# Altium PCB 自控mos驱动.PcbDoc
Units mil, origin at the board's own origin, x right, y up, seen from the top; angles counter-clockwise.
Board outline 8295 x 6950 mil, 2 copper layers (Top Layer, Bottom Layer); 103 components, 111 nets, 412 pads, 146 vias.
Unrouted connection lines stored in the file: 2.
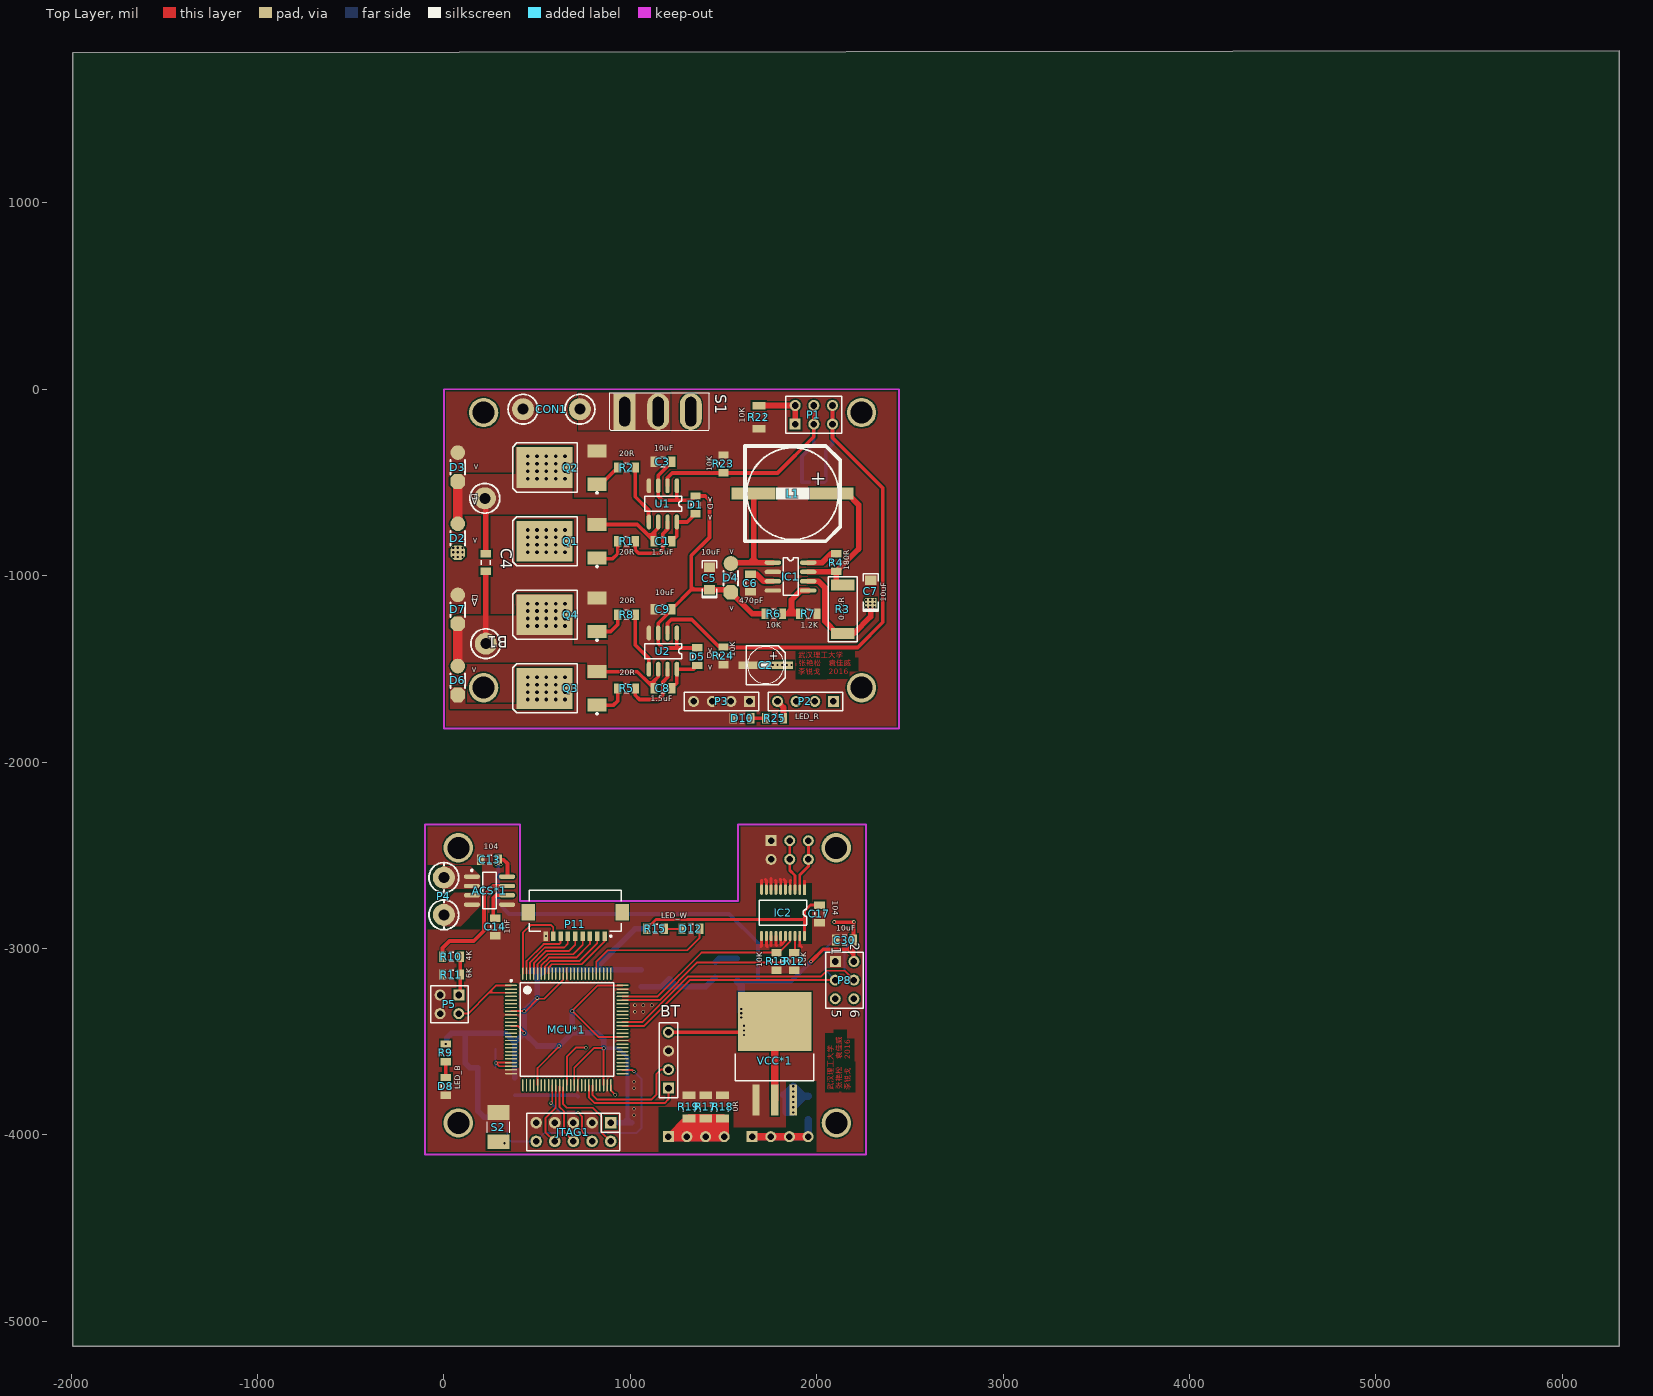
[diagram p0: Top Layer view]
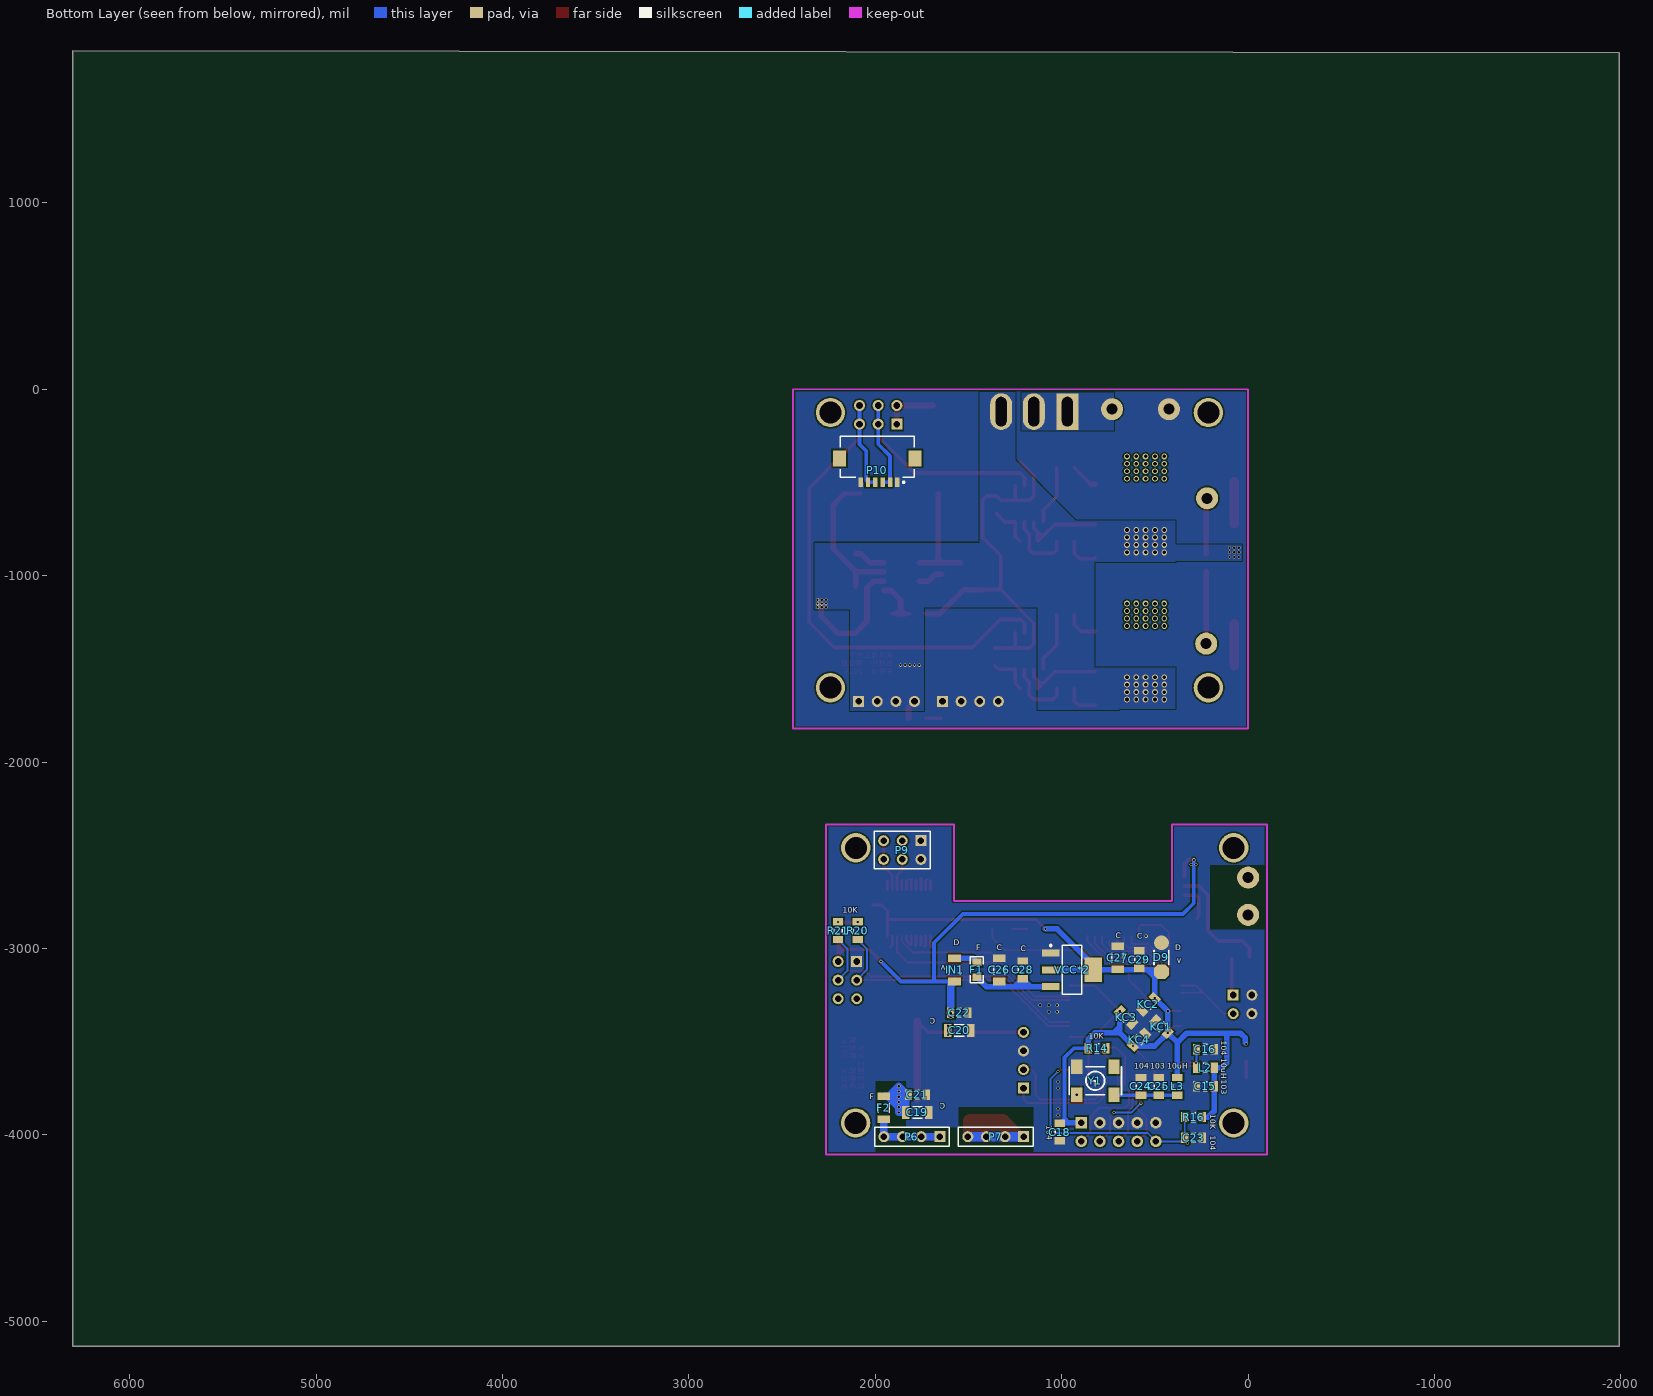
[diagram p1: Bottom Layer view, seen from below]

## Layer stack, top to bottom
Top Layer: signal copper 1.4
Dielectric: dielectric 12.6, FR-4, Dk 4.8
Bottom Layer: signal copper 1.4

## Board outline
-1990,1805 -1990,-5135 4165,-5135 6305,-5135 6305,1815

## Design rules (kind name [scope] priority, off if disabled: settings)
Clearance [All] p1: gap=8
PlaneConnect [All] p1: planeconnectstyle=Direct reliefexpansion=20 reliefentries=4 reliefconductorwidth=10 reliefairgap=10
PolygonConnect [All] p1: connectstyle=Direct reliefconductorwidth=10 reliefentries=4 polygonreliefangle="90 Angle" airgapwidth=10
RoutingVias [All] p1: holewidth=28 width=50 viastyle="Through Hole" minholewidth=28 minwidth=50 maxholewidth=28 maxwidth=50
SolderMaskExpansion [All] p1: expansion=4
Width [All] p1: maxlimit=80 minlimit=6 preferedwidth=20 minimp=50.000000 maximp=50.000000 favimp=50.000000
27 further rules are at their usual default settings.

## Classes and differential pairs
component class 自控mosV1.0: B1 C1 C2 C3 C4 C5 C6 C7 C8 C9 CON1 D1 D2 D3 D4 D5 D6 D7 D10 IC1 L1 P1 P2 P3 P10 Q1 Q2 Q3 Q4 R1 R2 R3 R4 R5 R6 R7 R8 R22 R23 R24 R25 S1 U1 U2
component class 主控板加电流检测v1: ACS*1 BT C13 C14 C15 C16 C17 C18 C19 C20 C21 C22 C23 C24 C25 C26 C27 C28 C29 C30 D8 D9 D12 F1 F2 IC2 IN1 JTAG1 KC1 KC2 KC3 KC4 L2 L3 MCU*1 P4 P5 P6 P7 P8 P9 P11 R9 R10 R11 R12 R13 R14 R15 R16 R17 R18 R19 R20 R21 S2 VCC*1 VCC*2 Y1

## Components (designator, comment, footprint, x,y, rotation, side; value= is the part's Value field where it differs from the comment)
ACS*1 "ACS712 AMPSENSOR" "SOIC1-8N ACS712" 245,-2690 r0 top
B1 "Motor" KF301-2P#1 225,-1090 r180 top
BT "Header 4" HDR1X4 1205,-3750 r90 top
C1 "CAP" C2012 1175,-815 r0 top
C2 "Cap" SMD-EC-F5 1815,-1480 r180 top
C3 "Cap Pol1" C2012 1175,-390 r180 top
C4 "Cap" C2012 225,-930 r270 top
C5 "Cap Pol1" 1206C 1425,-1015 r270 top
C6 "Cap" C2012 1645,-1040 r90 top
C7 "Cap Pol1" 1206C 2290,-1085 r270 top
C8 "Cap" C2012 1175,-1605 r0 top
C9 "Cap Pol1" C2012 1175,-1180 r180 top
C13 "Cap" C2012 245,-2525 r0 top
C14 "Cap" C2012 275,-2885 r270 top
C15 "100nF" C2012 230,-3740 r180 bottom
C16 "10nF" C2012 230,-3540 r0 bottom
C17 "100nF" C2012 2015,-2815 r270 top
C18 "100nF" C2012 1010,-3985 r270 bottom
C19 "Cap Pol1" 1206(2) 1775,-3880 r180 bottom
C20 "Cap Pol1" 1206(2) 1550,-3440 r180 bottom
C21 "Cap" C2012 1775,-3785 r0 bottom
C22 "Cap" C2012 1550,-3345 r0 bottom
C23 "100nF" C2012 292.76,-4015 r0 bottom
C24 "10nF" C2012 575,-3740 r270 bottom
C25 "100nF" C2012 480,-3740 r270 bottom
C26 "Cap Pol1" 1206(2) 1335,-3115 r90 bottom
C27 "Cap Pol1" 1206(2) 700,-3050 r90 bottom
C28 "Cap" C2012 1210,-3115 r270 bottom
C29 "Cap" C2012 585,-3060 r270 bottom
C30 "Cap Pol1" C2012 2150,-2955 r180 top
CON1 "PowerIn" KF301-2P#2 580,-107.2 r270 top
D1 "S4" R2012 1350,-620 r270 top
D2 "SS14" "hole-chip diode" 35,-721.67 r270 top
D3 "SS14" "hole-chip diode" 35,-340 r270 top
D4 "SS14" "hole-chip diode" 1500,-935 r270 top
D5 "S4" R2012 1360,-1435 r270 top
D6 "SS14" "hole-chip diode" 35,-1485 r270 top
D7 "SS14" "hole-chip diode" 35,-1103.33 r270 top
D8 "POWER" C2012 10,-3740 r270 top
D9 "1N4729A" "hole-chip diode" 505,-2970 r270 bottom
D10 "POWER" C2012 1600,-1765 r180 top
D12 "POWER" C2012 1325,-2895 r0 top
F1 "300mA" 0805(2012) 1455,-3115 r90 bottom
F2 "500mA" 1206(2) 1955,-3855 r90 bottom
IC1 "MC34063" MC34063 1860,-1005 r0 top
IC2 "74LVC245" "74LVC245 TSSOP" 1935,-2685 r270 top
IN1 "1SS355" 1206(2) 1575,-3115 r90 bottom
JTAG1 "Header 5X2" IDC5X2 695,-3985 r180 top
KC1 "100nF" C2012 465,-3420 r225 bottom
KC2 "100nF" C2012 535,-3300 r135 bottom
KC3 "100nF" C2012 655,-3370 r45 bottom
KC4 "100nF" C2012 585,-3490 r315 bottom
L1 "Inductor" SMD-EC-F12.5 2080,-560 r180 top
L2 "Inductor" C2012 230,-3640 r0 bottom
L3 "Inductor" C2012 380,-3740 r270 bottom
MCU*1 "k60P100" LQFP100 660,-3435 r0 top
P1 "Header 3X2" HDR2X3 1885,-187.2 r0 top
P2 "Header 4" HDR1X4 2090,-1675 r180 top
P3 "Header 4" HDR1X4 1640,-1675 r180 top
P4 "Header 2" KF301-2P#3 0,-2720 r0 top
P5 "Header 2X2" HDR2X2 80,-3250 r180 top
P6 "Header 4" HDR1X4 1654.06,-4010 r0 bottom
P7 "Header 4" HDR1X4 1204.06,-4010 r0 bottom
P8 "Header 3X2" HDR2X3 2100,-3070 r270 top
P9 "Header 3X2" HDR2X3 1755.73,-2422.2 r0 bottom
P10 "Header 6" FFC/SM1.0-2H6 1990,-435 r0 bottom
P11 "Header 9" FFC/SM1.0-2H9 705,-2870 r180 top
Q1 "IR7843" LR7843 680,-815 r0 top
Q2 "IR7843" LR7843 680,-420 r0 top
Q3 "IR7843" LR7843 680,-1605 r0 top
Q4 "IR7843" LR7843 680,-1210 r0 top
R1 "Res2" R2012 980,-815 r180 top
R2 "Res2" R2012 980,-420 r180 top
R3 "Res2" SK54 2140,-1180 r270 top
R4 "Res2" R2012 2105,-930 r270 top
R5 "Res2" R2012 980,-1605 r180 top
R6 "Res2" R2012 1770,-1205 r0 top
R7 "Res2" R2012 1955,-1205 r180 top
R8 "Res2" R2012 980,-1210 r180 top
R9 "1K" R2012 10,-3560 r90 top
R10 "注意精度" R2012 40,-3045 r0 top
R11 "注意精度" R2012 40,-3140 r0 top
R12 "Res2" R2012 1880,-3070 r270 top
R13 "Res2" R2012 1785,-3070 r270 top
R14 "10K" R2012 810,-3535 r180 bottom
R15 "1K" R2012 1135,-2895 r180 top
R16 "10K" R2012 292.76,-3905 r180 bottom
R17 "Res2" 1206(2) 1405,-3850 r90 top
R18 "Res2" 1206(2) 1495,-3850 r90 top
R19 "Res2" 1206(2) 1315,-3850 r90 top
R20 "Res2" R2012 2095,-2905 r90 bottom
R21 "Res2" R2012 2200,-2905 r270 bottom
R22 "Res2" 1206(2) 1690,-150 r90 top
R23 "Res2" R2012 1500,-400 r270 top
R24 "Res2" R2012 1500,-1430 r90 top
R25 "1K" R2012 1775,-1765 r0 top
S1 "SW-SPST" SW-125V6A(-) 970,-120 r0 top
S2 "SW-PB" "sw 3*4 *2" 232.76,-3880 r270 top
U1 "IR2104S" IR2104 1175,-615 r270 top
U2 "IR2104S" IR2104 1175,-1405 r270 top
VCC*1 "LM1086" "DPAK LM2940" 1775,-3565 r90 top
VCC*2 "LM1086" lm1117 905,-3100 r0 bottom
Y1 "50MHZ" 贴片有源晶体 720,-3635 r0 bottom

## Footprints (in the part's own frame and the unit in brackets; to place one, negate y for a bottom-side part, rotate by r counter-clockwise, add the part's x,y. Pads: shape width x height; smd on the part's side, far side on the other; paste and mask are expansions set on the pad)
"74LVC245 TSSOP" [mm]
  rect 1.4x0.4 smd: 1(0,0)
  oval 1.4x0.4 smd: 2(0,-0.65) 3(0,-1.3) 4(0,-1.95) 5(0,-2.6) 6(0,-3.25) 7(0,-3.9) 8(0,-4.55) 9(0,-5.2) 10(0,-5.85) 11(6.3,-5.85) 12(6.3,-5.2) 13(6.3,-4.55) 14(6.3,-3.9) 15(6.3,-3.25) 16(6.3,-2.6) 17(6.3,-1.95) 18(6.3,-1.3) 19(6.3,-0.65) 20(6.3,0)
  silkscreen extent 1.43,-6.18 4.87,0.33
0805(2012) [mil]
  rect 40x50 smd: 1(-40,0) 2(40,0)
  silkscreen extent -70,-35 70,35
1206(2) [mm]
  rect 1.05x1.75 smd: 1(-1.575,0) 2(1.575,0)
  silkscreen extent -0.65,-0.77 0.65,0.77, body extent -1.6,-0.8 1.6,0.8, height 1.6
1206C [mil]
  rect 50x60 smd: 1(60,0) 2(-60,0)
  silkscreen extent -95,-40 105,40
C2012 [mm] "Chip Capacitor, 2-Leads, Body 2.0x1.2mm, IPC Low Density"
  rect 1x1.45 smd: 1(-1.2,0) 2(1.2,0)
  silkscreen extent -0.3,-0.63 0.3,0.63, body extent -0.98,-0.6 1.02,0.6, height 0.5
"DPAK LM2940" [mm] "D2-PAK, 4-Pads, Body 7.93x8.69mm (max), IPC Medium Density"
  rect 4.2x1 smd: 1(-6.3,2.54) 2(-6.3,0) 3(-6.3,-2.54)
  rect 8x10 smd: 4(4.4,0)
  silkscreen extent -3.65,-5.35 0,5.35, body extent -3.65,-5.33 6,5.33, height 4.83
FFC/SM1.0-2H6 [mm] "Connector; FH12 Series; 6 Position; 1.0mm Spaced Bottom Eccentric Contact"
  rect 0.6x1.3 smd: 1(-2.75,1.625) 2(-1.75,1.625) 3(-0.75,1.625) 4(0.25,1.625) 5(1.25,1.625) 6(2.25,1.625)
  rect 1.8x2.2 smd: 7(5.15,-1.625) 8(-5.15,-1.625)
  silkscreen extent -5.05,-4.62 5.05,1.75, body extent -5.05,-4.62 5.05,0.97, height 2
FFC/SM1.0-2H9 [mm] "Connector; FH12 Series; 9 Position; 1.0mm Spaced Bottom Standard Contact"
  rect 0.6x1.3 smd: 1(-4,1.625) 2(-3,1.625) 3(-2,1.625) 4(-1,1.625) 5(0,1.625) 6(1,1.625) 7(2,1.625) 8(3,1.625) 9(4,1.625)
  rect 1.8x2.2 smd: 10(6.4,-1.625) 11(-6.4,-1.625)
  silkscreen extent -6.3,-4.62 6.3,1.75, body extent -6.3,-4.62 6.3,0.97, height 2
HDR1X4 [mm] "Connector; Header; 4 Position"
  rect 1.5x1.5 hole 0.9: 1(0,0)
  round 1.5 hole 0.9: 2(2.54,0) 3(5.08,0) 4(7.62,0)
  silkscreen extent -1.27,-1.27 8.89,1.27, body extent -1.27,-1.27 8.89,1.27, height 7.58
HDR2X2 [mm] "Connector; Header; 2x2 Position"
  rect 1.5x1.5 hole 0.9: 1(0,0)
  round 1.5 hole 0.9: 2(0,2.54) 3(2.54,0) 4(2.54,2.54)
  silkscreen extent -1.27,-1.27 3.81,3.81, body extent -1.27,-1.27 3.81,3.81, height 7.58
HDR2X3 [mm] "Connector; Header; 3x2 Position"
  rect 1.5x1.5 hole 0.9: 1(0,0)
  round 1.5 hole 0.9: 2(0,2.54) 3(2.54,0) 4(2.54,2.54) 5(5.08,0) 6(5.08,2.54)
  silkscreen extent -1.27,-1.27 6.35,3.81
"hole-chip diode" [mm]
  round 2 smd: 1(0,1.016)
  oct 2x2 smd: 2(3.937,1.016)
  silkscreen extent 1,0 3,2
IDC5X2 [mil]
  rect 62x62 hole 35: 1(-200,-50)
  round 62 hole 35: 2(-200,50) 3(-100,-50) 4(-100,50) 5(0,-50) 6(0,50) 7(100,-50) 8(100,50) 9(200,-50) 10(200,50)
  silkscreen extent -250,-100 250,100
IR2104 [mil]
  oval 80x23.62 smd: 1(-97,75) 2(-97,25) 3(-97,-25) 4(-97,-75) 5(97,-75) 6(97,-25) 7(97,25) 8(97,75)
  silkscreen extent -40,-98 40,100
KF301-2P#1 [mm]
  round 3 hole 1.5: 1(0.127,-12.827) 2(0,6.985)
  silkscreen extent -2.03,-14.86 2.16,9.02
KF301-2P#2 [mm]
  round 3 hole 1.5: 1(0,-3.937) 2(0,3.81)
  silkscreen extent -2.03,-5.97 2.03,5.84
KF301-2P#3 [mm]
  round 3 hole 1.5: 1(0,-2.54) 2(0,2.54)
  silkscreen extent -2.03,-4.57 2.03,4.57
lm1117 [mm]
  rect 2.4x0.95 smd: 1(3.916,-1.919) 2(3.916,0.381) 3(3.916,2.681)
  rect 2.4x3.3 smd: 4(-1.884,0.381)
  silkscreen extent -0.28,-3.07 4.04,3.73, body extent -0.83,-2.97 2.87,3.73, height 1.8
LQFP100 [mm] "SQFP, 100-Leads, Body 14.00x14.00mm, Pitch 0.50mm, IPC Medium Density"
  oval 1.65x0.2 smd: 1(-7.6,6) 2(-7.6,5.5) 3(-7.6,5) 4(-7.6,4.5) 5(-7.6,4) 6(-7.6,3.5) 7(-7.6,3) 8(-7.6,2.5) 9(-7.6,2) 10(-7.6,1.5) 11(-7.6,1) 12(-7.6,0.5) 13(-7.6,0) 14(-7.6,-0.5) 15(-7.6,-1) 16(-7.6,-1.5) 17(-7.6,-2) 18(-7.6,-2.5) 19(-7.6,-3) 20(-7.6,-3.5) 21(-7.6,-4) 22(-7.6,-4.5) 23(-7.6,-5) 24(-7.6,-5.5) 25(-7.6,-6) 51(7.6,-6) 52(7.6,-5.5) 53(7.6,-5) 54(7.6,-4.5) 55(7.6,-4) 56(7.6,-3.5) 57(7.6,-3) 58(7.6,-2.5) 59(7.6,-2) 60(7.6,-1.5) 61(7.6,-1) 62(7.6,-0.5) 63(7.6,0) 64(7.6,0.5) 65(7.6,1) 66(7.6,1.5) 67(7.6,2) 68(7.6,2.5) 69(7.6,3) 70(7.6,3.5) 71(7.6,4) 72(7.6,4.5) 73(7.6,5) 74(7.6,5.5) 75(7.6,6)
  oval 0.2x1.65 smd: 26(-6,-7.6) 27(-5.5,-7.6) 28(-5,-7.6) 29(-4.5,-7.6) 30(-4,-7.6) 31(-3.5,-7.6) 32(-3,-7.6) 33(-2.5,-7.6) 34(-2,-7.6) 35(-1.5,-7.6) 36(-1,-7.6) 37(-0.5,-7.6) 38(0,-7.6) 39(0.5,-7.6) 40(1,-7.6) 41(1.5,-7.6) 42(2,-7.6) 43(2.5,-7.6) 44(3,-7.6) 45(3.5,-7.6) 46(4,-7.6) 47(4.5,-7.6) 48(5,-7.6) 49(5.5,-7.6) 50(6,-7.6) 76(6,7.6) 77(5.5,7.6) 78(5,7.6) 79(4.5,7.6) 80(4,7.6) 81(3.5,7.6) 82(3,7.6) 83(2.5,7.6) 84(2,7.6) 85(1.5,7.6) 86(1,7.6) 87(0.5,7.6) 88(0,7.6) 89(-0.5,7.6) 90(-1,7.6) 91(-1.5,7.6) 92(-2,7.6) 93(-2.5,7.6) 94(-3,7.6) 95(-3.5,7.6) 96(-4,7.6) 97(-4.5,7.6) 98(-5,7.6) 99(-5.5,7.6) 100(-6,7.6)
  silkscreen extent -7.72,-6.38 6.38,6.77, body extent -7,-7 7,7, height 1.7
LR7843 [mm]
  rect 2.54x1.778 smd: 1(3.6,-2.28) 3(3.6,2.28)
  rect 7.6x5.55 smd: 2(-3.556,0)
  silkscreen extent -7.87,-3.58 3.73,3.35
MC34063 [mm]
  oval 2.25x0.6 smd: 1(-2.4,1.905) 2(-2.4,0.635) 3(-2.4,-0.635) 4(-2.4,-1.905) 5(2.4,-1.905) 6(2.4,-0.635) 7(2.4,0.635) 8(2.4,1.905)
  silkscreen extent -1.02,-2.55 1.02,2.55
R2012 [mm] "Chip Resistor, 2-Leads, Body 2.0x1.2mm, IPC Low Density"
  rect 1x1.4 smd: 1(-1.2,0) 2(1.2,0)
  silkscreen extent -0.3,-0.6 0.3,0.6, body extent -0.98,-0.6 1.02,0.6, height 0.5
SK54 [mm]
  rect 1.52x3.18 smd: A(-3.305,0) K(3.305,0)
  silkscreen extent -4.43,-2 4.43,2.01
SMD-EC-F5 [mm]
  rect 3x1 smd: 1(0,0) 2(4.477,0)
  silkscreen extent -0.41,-2.65 4.89,2.66
SMD-EC-F12.5 [mm]
  rect 6x1.6 smd: 1(0,0) 2(10.625,0)
  silkscreen extent -1.2,-6.5 11.8,6.49
"SOIC1-8N ACS712" [mm]
  oval 2.2x0.6 smd: 1(-2.4,1.905) 2(-2.4,0.635) 3(-2.4,-0.635) 4(-2.4,-1.905) 5(2.4,-1.905) 6(2.4,-0.635) 7(2.4,0.635) 8(2.4,1.905)
  silkscreen extent -2.52,-2.5 0.9,2.88, body extent -2,-2.5 2,2.5, height 1.75
"sw 3*4 *2" [mm]
  rect 2x3 smd: 1(0,1.524) 2(4,1.524)
  silkscreen extent 1.27,0 2.79,3.05
SW-125V6A(-) [mm]
  rect 3x5 hole 1.5 slot 4 at 90 deg: 0(0,0)
  oval 3x5 hole 1.5 slot 4 at 90 deg: 1(4.572,0) 2(9.017,0)
  silkscreen extent -2.03,-2.54 11.56,2.54
贴片有源晶体 [mil]
  rect 60x80 smd: 1(0,0) 2(200,0) 3(200,150) 4(0,150)
  silkscreen extent -40,0 240,150, body extent -37,-23 238,173, height 74

## Part data
B1: library part "Motor Servo", "Servo Motor"
BT P2 P3 P6 P7: "Header, 4-Pin"
C1 C15 C16 C17 C18 C23 C24 C25 KC1 KC2 KC3 KC4: library part Cap, "Capacitor"
C2: library part CAP+
C3 C5 C7 C9 C19 C20 C26 C27 C30: "Polarized Capacitor (Radial)"
C4 C6 C8 C13 C14: "Capacitor"
C21 C22 C28 C29: "贴片电容"
CON1: library part "Header 2", "Header, 2-Pin"
D1 D2 D3 D4 D5 D6 D7: library part "Diode 1N4007", "1 Amp General Purpose Rectifier"
D8 D10 D12: library part LED, "Typical INFRARED GaAs LED"
D9 IN1: library part "Diode 1N4148", "High Conductance Fast Diode"
F1 F2: library part "Fuse 1", "Fuse"
JTAG1: "Header, 5-Pin, Dual row"
P1 P8 P9: "Header, 3-Pin, Dual row"
P4: "Header, 2-Pin"
P5: "Header, 2-Pin, Dual row"
P10: "Header, 6-Pin"
P11: "Header, 9-Pin"
Q1 Q2 Q3 Q4: library part NMOS-2, "N-Channel Power MOSFET"
R1 R2 R3 R4 R5 R6 R7 R8 R12 R13 R17 R18 R19 R20 R21 R22 R23 R24: "Resistor"
R9 R14 R15 R25: library part Res, "Resistor of led"
R10 R11: library part Res2, "Resistor"
R16: library part Res, "Resistor"
S1: "Single-Pole, Single-Throw Switch"
S2: "Switch"
U1 U2: library part Component_1_1
Y1: library part XTAL1

## Free pads (board coordinates)
  round 157.48 hole 118.11: 0(2105,-2460) 0(2240.94,-125) 1(77.44,-2460) 1(213.39,-125) 2(2105.94,-3936.38) 2(2240.94,-1601.38) 3(77.44,-3936.38) 3(213.39,-1601.38)

## Via types
v1: diameter 31.5, hole 19.68, Top Layer to Bottom Layer, 80 vias
v2: diameter 18, hole 12, Top Layer to Bottom Layer, 66 vias

## Nets (pads, with @x,y where several pads share a name; then routed paths per layer and width w, separated by ;. In a path a pad name is that pad's centre, name@x,y a point inside that pad or via, vN(x,y) a via of type N, cw(c..) or ccw(c..) an arc to the next point about the centre after c; other vN are vias at no path point)
5V: ACS*1.8 BT.4 C13.2 C20.1 C22.2 C30.1 IN1.1 P8.2 R20.2 R21.1 VCC*1.2 VCC*1.4 | length 4323.1
  Top Layer w20: v2(292.24,-2525) 321.06,-2525 341.06,-2545 341.06,-2613.43 ACS*1.8 ; BT.4 1716.77,-3450 VCC*1.4 ; v2(1970,-3070) 2035,-3005 2170,-3005 ; v2@2095,-2860 2195,-2860 2197.24,-2862.24 C30.1 C30.1@2197.24,-2977.76 ; P8.2 2197.24,-3067.24 2197.24,-3032.24 ; 2170,-3005 C30.1@2197.24,-2977.76 ; 2170,-3005 2197.24,-3005 ; 2170,-3005 2197.24,-3032.24 ; 2197.24,-3032.24 2197.24,-3005 ; 2197.24,-3005 C30.1@2197.24,-2977.76
  Top Layer w40: VCC*1.2 VCC*1.4
  Bottom Layer w20: v2(292.24,-2525) 292.24,-2757.24 350,-2815 1530,-2815 1685,-2970 1685,-3177.01 ; IN1.1 1862.99,-3177.01 v2(1970,-3070)
  Bottom Layer w40: IN1.1 1595,-3197.01 v2(1595,-3325) 1595,-3342.76 C22.2
  other v2: 1610,-3465 1610,-3440 1610,-3415 1595,-3370 1595,-3347.5 2095,-2857.76 2200,-2857.76 280,-2550 305,-2550
12V: C3.1 C5.1 C9.1 D1.1 D4.2 D5.1 R6.1 U1.1 U1.3 U2.1 U2.3 | length 2255.1
  Top Layer w20: C3.1 1150,-462.24 U1.3 1150,-575 1170,-595 1250,-595 ; U2.1 1250,-1387.76 ; U1.1 1250,-595 ; 1350,-1075 1342.24,-1075 ; D5.1 1250,-1387.76 ; C5.1 1342.24,-1075 ; D4.2@1525,-1075 D4.2 ; 1250,-1387.76 1172.76,-1387.76 1150,-1365 U2.3 1150,-1255 1222.24,-1182.76 C9.1 1327.24,-1075 ; 1250,-595 1327.76,-595 D1.1 1402.76,-572.76 1425,-595 1425,-795 1327.24,-892.76 1327.24,-1060 ; 1327.24,-1075 1327.24,-1060 ; 1327.24,-1075 1342.24,-1075 ; 1327.24,-1060 1342.24,-1075
  Top Layer w30: C5.1 D4.2@1525,-1075 ; D4.2 1655,-1205 R6.1
EGND: C2.2 C3.2 C5.2 C6.1 C7.2 C9.2 CON1.1 D3.1 D7.1 D10.2 IC1.2 IC1.4 P3.1 P3.2 P3.3 P3.4 P7.1 P7.2 P7.3 P7.4 P10.1 P10.6 Q2.3 Q4.3 R7.1 R17.1 R18.1 R19.1 R22.1 R23.1 R24.1 U1.4 U2.4 | length 1606.3
  Top Layer w50: P7.1 P7.1@1217.01,-4010 ; 1445,-3945 1430,-3960 1404.06,-3960 ; P7.1@1217.01,-4010 R19.1@1304.06,-3922.95 ; P7.1@1217.01,-4010 P7.2 ; P7.2 R19.1@1304.06,-3922.95 ; P7.2 P7.3 ; R19.1@1304.06,-3922.95 R19.1 R17.1 ; P7.3 1404.06,-3975 ; P7.3 P7.4 1504.06,-3975 ; 1404.06,-3975 1340,-3975 1325,-3960 1404.06,-3960 ; 1404.06,-3975 1404.06,-3960 ; 1404.06,-3975 1504.06,-3975 ; 1404.06,-3960 1404.06,-3912.95 R17.1 ; R17.1 1441.06,-3912.01 ; 1441.06,-3912.01 1504.06,-3975 ; 1441.06,-3912.01 R18.1 1504.06,-3921.06 1504.06,-3975
  Bottom Layer w50: P7.1 P7.2 P7.3 P7.4
GND: ACS*1.5 BT.3 C13.1 C14.2 C15.1 C16.1 C17.2 C18.2 C19.2 C20.2 C21.1 C22.1 C23.1 C24.1 C25.1 C26.2 C27.2 C28.1 C29.1 C30.2 D8.2 D9.1 IC2.1 IC2.4 IC2.5 IC2.6 IC2.7 IC2.8 IC2.9 IC2.10 IC2.11 IC2.12 IC2.13 IC2.14 IC2.15 IC2.16 IC2.19 JTAG1.3 JTAG1.5 JTAG1.7 JTAG1.9 KC1.1 KC2.1 KC3.1 KC4.1 MCU*1.9 MCU*1.24 MCU*1.25 MCU*1.41 MCU*1.49 MCU*1.60 MCU*1.74 MCU*1.88 P5.3 P5.4 P8.1 P9.1 P9.2 P11.9 R11.1 R12.2 R13.2 R17.2 R18.2 R19.2 S2.1 VCC*1.1 VCC*2.1 Y1.2 | length 819
  Top Layer w15: 1700,-2990 1704.68,-2985.32 IC2.11 ; IC2.10 1704.68,-2635.32 1705,-2635 ; 1725,-2630 1730.28,-2635.28 IC2.9 ; IC2.12 1730.28,-2985.28 1735,-2990 ; 1755,-2985 1755.87,-2984.13 IC2.13 ; 1755,-2625 1755.87,-2625.87 IC2.8 ; 1780,-2635 1781.46,-2636.46 IC2.7 ; IC2.14 1781.46,-2981.46 1785,-2985 ; 1805,-2630 1807.05,-2632.05 IC2.6 ; IC2.15 1807.05,-2977.05 1810,-2980 1832.64,-2957.36 IC2.16 ; 1825,-2630 1832.64,-2637.64 IC2.5 ; IC2.4 1858.23,-2636.77 1860,-2635 ; IC2.19 1909.41,-2983 1918.52,-2992.11 ; IC2.1 1935,-2640
  other v2: 1020,-3895 1020,-3860 1020,-3750 1020,-3715 1025,-3340 1070,-3340 1025,-3305 1070,-3305 1115,-3305 547.52,-2933.98
IN3: ACS*1.1 ACS*1.2 P4.2
IN4: ACS*1.3 ACS*1.4 P4.1
K3.3V: C15.2 C17.1 C18.1 C27.1 C29.2 D9.2 IC2.20 JTAG1.1 KC1.2 KC2.2 KC3.2 KC4.2 L2.1 L3.1 MCU*1.8 MCU*1.12 MCU*1.30 MCU*1.40 MCU*1.48 MCU*1.61 MCU*1.75 MCU*1.89 R9.2 R14.1 R15.2 R16.2 VCC*2.2 VCC*2.4 | length 7000.1
  Top Layer w10: MCU*1.12 395.32,-3415.32 v2@435,-3455 ; MCU*1.8 438.43,-3336.57 505,-3270 538.91,-3270 640.32,-3168.6 MCU*1.89 ; MCU*1.30 502.52,-3642.48 v2@620,-3525 ; MCU*1.40 699.37,-3640.63 805,-3535 855,-3535 856.85,-3536.85 MCU*1.48 ; MCU*1.61 829.37,-3474.37 690,-3335 826.22,-3198.78 MCU*1.75
  Top Layer w15: R15.2 1137.76,-2845 1935,-2845 ; IC2.20 1935,-2845 ; C17.1 1967.24,-2767.76 1935,-2800 1935,-2845
  Bottom Layer w20: v2(857.24,-3535) 935,-3535 985,-3585 985,-3910 ; 955,-3935 960,-3935 985,-3910 ; 985,-3912.76 1007.24,-3935 C18.1 987.76,-3937.76 985,-3935 985,-3912.76 ; 985,-3912.76 985,-3910
  Bottom Layer w30: 15,-3505 15,-3480 40,-3455 330,-3455 380,-3505 ; 115,-3455 115,-3615 140,-3640 L2.1 C15.2 182.76,-3872.76 215,-3905 R16.2 ; L3.1 380,-3505 ; D9.2 475,-3115 510,-3115 ; v2(688.41,-3336.59) 688.41,-3420 ; v2(857.24,-3535) 857.24,-3487.24 823.41,-3453.41 720,-3453.41 ; JTAG1.1 955,-3935 ; 960,-3935 985,-3935 C18.1@1007.24,-3935 ; VCC*2.2 VCC*2.4 ; v2(1087.24,-2895) 1025,-2895 830.83,-3089.17 VCC*2.4 ; 380,-3505 v2(431.59,-3453.41) ; v2(431.59,-3453.41) 501.59,-3523.41 v2(618.41,-3523.41) 688.41,-3453.41 ; v2(431.59,-3453.41) v2(431.59,-3336.59) v2(501.59,-3266.59) 501.59,-3150 ; 501.59,-3150 501.59,-3123.41 510,-3115 ; 501.59,-3150 505,-3150 540,-3115 ; 510,-3115 540,-3115 ; 540,-3115 VCC*2.4 ; 688.41,-3453.41 720,-3453.41 ; 688.41,-3453.41 688.41,-3420 ; 688.41,-3420 720,-3451.59 720,-3453.41
  other v2: 10,-3512.76
MOTTO_IN1: IC2.2 P9.5 P9.6 | length 282
  Top Layer w15: IC2.2 1909.41,-2605.59 1955.73,-2559.27 P9.6 P9.5
MOTTO_IN2: IC2.3 P9.3 P9.4 | length 274.4
  Top Layer w15: P9.3 P9.4 1855.73,-2580.73 1883.82,-2608.82 IC2.3
NetACS*1_6: ACS*1.6 C14.1 | length 192.6
  Top Layer w20: C14.1 265,-2827.76 265,-2730 280,-2715 ACS*1.6
NetACS*1_7: ACS*1.7 R10.1 | length 643.4
  Top Layer w20: R10.1 -7.24,-2997.24 30,-2960 160,-2960 215,-2905 215,-2715 265,-2665 ACS*1.7
NetC1_2: C1.2 D1.2 U1.8 | length 233
  Top Layer w20: C1.2 1250,-787.24 U1.8 1305.24,-712 D1.2
NetC6_2: C6.2 IC1.3 | length 135.9
  Top Layer w30: C6.2 1677.76,-992.76 1715,-1030 IC1.3
NetC8_2: C8.2 D5.2 U2.8 | length 232.7
  Top Layer w20: C8.2 1250,-1577.24 U2.8 1340.24,-1502 D5.2
NetC16_2: C16.2 L2.2 MCU*1.22 MCU*1.23 | length 269.7
  Top Layer w10: MCU*1.23 296.85,-3631.85 v2(280,-3615) 282.83,-3612.17 MCU*1.22
  Bottom Layer w10: L2.2 C16.2
NetC19_1: C19.1 C21.2 F2.2 VCC*1.3 | length 633.7
  Bottom Layer w40: F2.2 F2.2@1934.01,-3792.99 ; C21.2@1830.24,-3792.99 v2@1875,-3792.99 ; C21.2@1830.24,-3792.99 1837.01,-3799.76 C19.1 v2(1875,-3880) v2(1875,-3852) ; C21.2@1830.24,-3792.99 C21.2 1830,-3785 v2(1875,-3740) ; v2(1875,-3852) F2.2@1934.01,-3792.99 ; v2(1875,-3852) v2(1875,-3824) v2(1875,-3796) v2@1875,-3792.99 ; v2@1875,-3792.99 F2.2@1927.99,-3792.99 ; v2@1875,-3792.99 v2(1875,-3768) v2(1875,-3740) ; v2(1875,-3740) F2.2@1927.99,-3792.99 ; F2.2@1927.99,-3792.99 F2.2@1934.01,-3792.99
NetC24_2: C24.2 C25.2 L3.2 Y1.4 | length 343.2
  Bottom Layer w20: L3.2 C25.2 C24.2 712.24,-3787.24 Y1.4@720,-3795
NetC26_1: C26.1 C28.2 F1.1 VCC*2.3 | length 611.3
  Bottom Layer w30: VCC*2.3 1166.69,-3205.55 ; 1280,-3205.55 1253.31,-3205.55 ; F1.1 1404.45,-3205.55 1253.31,-3205.55 ; 1166.69,-3205.55 1215,-3205.55 ; 1166.69,-3205.55 C28.2 ; C28.2 1253.31,-3205.55 ; C28.2 1210,-3200.55 1215,-3205.55 ; 1215,-3205.55 1253.31,-3205.55
NetD4_1: D4.1 IC1.1 L1.2 | length 672.3
  Top Layer w20: D4.1 D4.1@1545,-930 ; 1636.68,-930 1661.68,-905 ; 1660,-930 1661.68,-928.31 1661.68,-905 ; 1690,-930 1686.68,-930 1661.68,-905
  Top Layer w30: D4.1@1545,-930 1636.68,-930 1660,-930 1686.68,-930 IC1.1 ; 1661.68,-905 L1.2
NetD8_1: D8.1 R9.1 | length 85.5
  Top Layer w20: D8.1 R9.1
NetD10_1: D10.1 R25.1 | length 80.5
  Top Layer w20: D10.1 R25.1
NetD12_1: D12.1 R15.1 | length 85.5
  Top Layer w10: R15.1 D12.1@1267.76,-2895
NetF1_2: F1.2 IN1.2 | length 129.1
  Bottom Layer w30: F1.2 1477.01,-3052.99 IN1.2
NetIC1_5: IC1.5 R6.2 R7.2 | length 348.5
  Top Layer w20: R6.2 1840,-1205 ; 1860,-1205 1865,-1200 ; R7.2@1890,-1205 R7.2
  Top Layer w30: 1865,-1200 1865,-1180 ; IC1.5 1915,-1080 1865,-1130 1865,-1180 ; 1865,-1180 1840,-1205 1860,-1205 1890,-1205 1865,-1180
NetIC1_7: IC1.7 L1.1 R3.A R4.2 | length 809
  Top Layer w20: L1.1 L1.1@2165,-560 ; R4.2@2102.24,-980 R4.2
  Top Layer w30: IC1.7 R4.2@2102.24,-980 ; R3.A@2105,-1057.76 R4.2 2225,-857.24 2225,-620 L1.1@2165,-560
NetIC1_8: IC1.8 R4.1 | length 170.1
  Top Layer w30: IC1.8 2030,-930 2077.24,-882.76 R4.1
NetP1_1: P1.1 P1.2 R22.2 | length 295.8
  Top Layer w30: R22.2 1690,-87.2 P1.2 P1.1
NetP5_1: P5.1 R10.2 R11.2 | length 198.2
  Top Layer w20: P5.1 87.76,-3242.24 87.76,-3145 R10.2@87.76,-3055
NetQ1_1: Q1.1 R1.2 | length 191.9
  Top Layer w20: Q1.1 826.97,-910 905,-910 932.76,-882.24 R1.2
NetQ2_1: Q2.1 R2.2 | length 148.2
  Top Layer w20: Q2.1@842.99,-509.76 R2.2
  Top Layer w30: Q2.1 Q2.1@842.99,-509.76
NetQ3_1: Q3.1 R5.2 | length 187.6
  Top Layer w20: Q3.1 910.24,-1694.76 932.76,-1672.24 R5.2
NetQ4_1: Q4.1 R8.2 | length 178.8
  Top Layer w20: Q4.1 895.24,-1299.76 932.76,-1262.24 R8.2
NetR1_1: R1.1 U1.7 | length 369
  Top Layer w20: R1.1 1027.24,-862.24 1045,-880 1155,-880 1175,-860 1175,-775 1200,-750 U1.7
NetR2_1: R2.1 U1.5 | length 319.3
  Top Layer w20: R2.1 1027.24,-577.24 1098,-648 U1.5@1098,-710
NetR5_1: R5.1 U2.7 | length 353.1
  Top Layer w20: R5.1 1027.24,-1642.24 1050,-1665 1150,-1665 1175,-1640 1175,-1570 1200,-1545 U2.7
NetR8_1: R8.1 U2.5 | length 322.1
  Top Layer w20: R8.1 1027.24,-1372.24 1100,-1445 U2.5
OUT1: B1.1 C1.1 C4.1 D2.1 D3.2 Q1.3 Q2.2 U1.6 | length 1027
  Top Layer w20: Q1.3 1037.99,-725.24 1095,-782.24 ; U1.6 1150,-745 1130,-765 ; 1095,-782.24 1112.76,-782.24 1130,-765 ; 1095,-782.24 C1.1 1130,-812.76 1130,-765
  Top Layer w30: B1.1 225,-585 C4.1
  Top Layer w50: D2.1 D3.2
  other v1: 450,-480 500,-480 550,-480 600,-480 650,-480 450,-440 500,-440 550,-440 600,-440 650,-440 450,-400 500,-400 550,-400 600,-400 650,-400 450,-360 500,-360 550,-360 600,-360 650,-360
OUT2: B1.2 C4.2 C8.1 D6.1 D7.2 Q3.3 Q4.2 U2.6 | length 1103.3
  Top Layer w20: Q3.3 1037.99,-1515.24 1098.88,-1576.12 ; U2.6 1150,-1542.76 1127.76,-1565 ; 1098.88,-1576.12 1116.63,-1576.12 1127.76,-1565 ; 1098.88,-1576.12 C8.1 1127.76,-1565
  Top Layer w30: B1.2 C4.2
  Top Layer w50: D6.1 D7.2
  other v1: 450,-1270 500,-1270 550,-1270 600,-1270 650,-1270 450,-1230 500,-1230 550,-1230 600,-1230 650,-1230 450,-1190 500,-1190 550,-1190 600,-1190 650,-1190 450,-1150 500,-1150 550,-1150 600,-1150 650,-1150
PTA0: JTAG1.4 MCU*1.34 | length 450.2
  Top Layer w10: v2(575,-3830) 581.26,-3823.74 MCU*1.34 ; v2(720,-3880) 741,-3901 741,-3981 JTAG1.4
  Bottom Layer w10: v2(575,-3830) 625,-3880 v2(720,-3880)
PTA1: JTAG1.8 MCU*1.35 | length 343.6
  Top Layer w10: JTAG1.8 545,-3985 545,-3910 600.2,-3854.8 MCU*1.35@600.2,-3734.96
PTA2: JTAG1.6 MCU*1.36 | length 326
  Top Layer w10: MCU*1.36@620.2,-3740 620.2,-3850.2 645,-3875 645,-3985 JTAG1.6
PTA3: JTAG1.2 MCU*1.37 | length 477.6
  Top Layer w10: MCU*1.37@640.2,-3745 640.2,-3835.2 660,-3855 800,-3855 845,-3900 845,-3985 JTAG1.2
PTA4: MCU*1.38 R14.2 | length 276.4
  Top Layer w10: MCU*1.38 660,-3580 707.5,-3532.5 v2(762.5,-3532.5)
PTA5: MCU*1.39
PTA12: MCU*1.42
PTA13: MCU*1.43
PTA14: BT.1 MCU*1.44 | length 572.3
  Top Layer w10: MCU*1.44 778.11,-3798.11 810,-3830 1185,-3830 1205,-3810 BT.1
PTA15: BT.2 MCU*1.45 | length 600.7
  Top Layer w10: MCU*1.45 797.8,-3787.8 820,-3810 1115,-3810 1140,-3785 1140,-3675 1165,-3650 BT.2
PTA16: MCU*1.46
PTA17: MCU*1.47
PTA18: MCU*1.50 Y1.3 | length 60.6
  Top Layer w11: MCU*1.50 896.22,-3761.22 v2(920,-3785)
PTA19: MCU*1.51
PTB0: MCU*1.53
PTB1: MCU*1.54
PTB2: MCU*1.55
PTB3: MCU*1.56
PTB9: MCU*1.57
PTB10: MCU*1.58
PTB11: MCU*1.59
PTB16: MCU*1.62
PTB17: MCU*1.63
PTB18: MCU*1.64 P8.3 R20.1 | length 1503.6
  Top Layer w10: MCU*1.64 1074.68,-3415.32 1320,-3170 P8.3
  Bottom Layer w10: R20.1 2045,-3002.24 2045,-3115 P8.3
PTB19: MCU*1.65 P8.4 R21.2 | length 1634.8
  Top Layer w10: MCU*1.65 1064.83,-3395.63 1310.46,-3150 2025,-3150 2055,-3120 2150,-3120 P8.4
  Bottom Layer w10: P8.4 2150,-3120 2150,-3002.24 R21.2
PTB20: MCU*1.66
PTB21: MCU*1.67
PTB22: MCU*1.68
PTB23: MCU*1.69
PTC0: MCU*1.70
PTC1: IC2.18 MCU*1.71 R12.1 | length 1117.6
  Top Layer w10: MCU*1.71 1157.48,-3277.52 1360,-3075 1827.76,-3075 R12.1 ; R12.1@1883.82,-3018.94 IC2.18
  Top Layer w15: R12.1 R12.1@1883.82,-3018.94
PTC2: IC2.17 MCU*1.72 R13.1 | length 1050.4
  Top Layer w10: MCU*1.72 1147.17,-3257.83 1382.24,-3022.76 R13.1 ; R13.1@1797.24,-3022.76 1858.23,-2961.77 IC2.17
  Top Layer w15: R13.1 R13.1@1797.24,-3022.76
PTC3: MCU*1.73
PTC4: MCU*1.76
PTC5: MCU*1.77
PTC6: MCU*1.78
PTC7: MCU*1.79
PTC8: D12.2 MCU*1.80 | length 719.5
  Top Layer w10: MCU*1.80 817.48,-3072.52 880,-3010 1305,-3010 1372.24,-2942.76 D12.2
PTC9: MCU*1.81
PTC10: MCU*1.82
PTC11: MCU*1.83
PTC12: MCU*1.84
PTC13: MCU*1.85
PTC14: MCU*1.86
PTC15: MCU*1.87
PTC16: MCU*1.90
PTC17: MCU*1.91
PTC18: MCU*1.92
PTD0: MCU*1.93 P11.1 | length 420.4
  Top Layer w10: MCU*1.93 561.57,-3102.98 579.55,-3085 740,-3085 862.48,-2962.52 P11.1
PTD1: MCU*1.94 P11.2 | length 409.6
  Top Layer w10: MCU*1.94 541.89,-3097.21 572.1,-3067 728,-3067 823.11,-2971.89 P11.2
PTD2: MCU*1.95 P11.3 | length 395.9
  Top Layer w10: MCU*1.95 522.2,-3091.44 564.64,-3049 711,-3049 783.74,-2976.26 P11.3
PTD3: MCU*1.96 P11.4 | length 356.4
  Top Layer w10: MCU*1.96 502.52,-3085.66 557.18,-3031 694,-3031 745,-2980 745,-2960
PTD4: MCU*1.97 P11.5 | length 365.5
  Top Layer w10: MCU*1.97 482.83,-3079.89 549.73,-3013 672,-3013 705,-2980 P11.5
PTD5: MCU*1.98 P11.6 | length 343.1
  Top Layer w10: MCU*1.98 463.15,-3074.12 542.27,-2995 645,-2995 665,-2975 665,-2945 P11.6@671.02,-2938.98
PTD6: MCU*1.99 P11.7 | length 326.3
  Top Layer w10: MCU*1.99 443.46,-3068.35 534.82,-2977 618,-2977 626.26,-2968.74 P11.7
PTD7: MCU*1.100 P11.8 | length 451.8
  Top Layer w10: MCU*1.100 423.78,-2916.22 465,-2875 575,-2875 586.89,-2886.89 P11.8
PTE0: MCU*1.1 MCU*1.3 P5.2 | length 477.6
  Top Layer w10: P5.2 130,-3350 241.85,-3238.15 ; MCU*1.3 260,-3238.15 ; MCU*1.1 281.22,-3198.78 255,-3225 ; 241.85,-3238.15 255,-3225 ; 241.85,-3238.15 260,-3238.15 ; 255,-3225 255,-3233.15 260,-3238.15
PTE1: MCU*1.2
PTE3: MCU*1.4
PTE4: MCU*1.5
PTE5: MCU*1.6
PTE6: MCU*1.7
PTE24: MCU*1.31
PTE25: MCU*1.32
PTE26: MCU*1.33
PWM1: P1.3 P1.4 P10.2 P10.3 R23.2 U1.2 | length 1564.5
  Top Layer w20: U1.2 1200,-475 1225,-450 1790,-450 1985,-255 P1.3 P1.4
  Bottom Layer w20: P10.3 P10.2 1921.1,-358.9 1985,-295 P1.3 P1.4
PWM2: P1.5 P1.6 P10.4 P10.5 R24.2 U2.2 | length 3079.1
  Top Layer w20: U2.2 1200,-1255 1220,-1235 1330,-1235 1480,-1385 2220,-1385 2355,-1250 2355,-530 2085,-260 P1.5 P1.6
  Bottom Layer w20: P10.4 P10.5 2048.77,-489.42 2048.77,-331.23 2085,-295 P1.5 P1.6
RESET: C23.2 JTAG1.10 MCU*1.52 R16.1 S2.2 | length 1289.4
  Top Layer w10: MCU*1.52 1011.54,-3651.54 v2(1020,-3660)
  Bottom Layer w10: v2(325,-4045) 325,-4030 C23.2 ; R16.1 C23.2 ; v2(1020,-3660) 1060,-3700 1060,-3965 1035,-3990 540,-3990 JTAG1.10 360,-4035 C23.2
USB0_DM: MCU*1.11
USB0_DP: MCU*1.10
VBAT: CON1.2 S1.0 S1.1
VCC: C2.1 C7.1 D2.2 D6.2 F2.1 IC1.6 P2.1 P2.2 P2.3 P2.4 P6.1 P6.2 P6.3 P6.4 Q1.2 Q3.2 R3.K R25.2 S1.2 | length 1479.7
  Top Layer w20: C7.1@2282.76,-1152.24 C7.1
  Top Layer w30: P2.4 1822.24,-1707.24 R25.2 ; IC1.6 2010,-1030 2044.93,-1064.93 2044.93,-1244.93 2110.12,-1310.12 R3.K 2199.88,-1310.12 2290,-1220 C7.1 ; C7.1@2282.76,-1152.24 C7.1@2287.5,-1152.24
  Top Layer w40: P6.1 P6.2 P6.3 P6.4
  Bottom Layer w40: P6.1 P6.2 P6.3 P6.4 F2.1@1954.06,-3917.95
  other v1: 450,-1665 500,-1665 550,-1665 600,-1665 650,-1665 450,-1625 500,-1625 550,-1625 600,-1625 650,-1625 450,-1585 500,-1585 550,-1585 600,-1585 650,-1585 450,-1545 500,-1545 550,-1545 600,-1545 650,-1545 450,-875 500,-875 550,-875 600,-875 650,-875 450,-835 500,-835 550,-835 600,-835 650,-835 450,-795 500,-795 550,-795 600,-795 650,-795 450,-755 500,-755 550,-755 600,-755 650,-755
  other v2: 1765,-1480 1790,-1480 1815,-1480 1840,-1480 1865,-1480 2265,-1170 2287.5,-1170 2310,-1170 2265,-1150 2287.5,-1150 2310,-1150 2265,-1130 2287.5,-1130 2310,-1130 50,-900 75,-900 100,-900 50,-875 75,-875 100,-875 50,-850 75,-850 100,-850
VREGIN: MCU*1.13
pads on no net: MCU*1.14 MCU*1.15 MCU*1.16 MCU*1.17 MCU*1.18 MCU*1.19 MCU*1.20 MCU*1.21 MCU*1.26 MCU*1.27 MCU*1.28 MCU*1.29 P8.5 P8.6 P10.7 P10.8 P11.10 P11.11 Y1.1

## Polygon pours and split planes (outlines as drawn)
EGND on Bottom Layer "Keep-Out Layer-No Net" (solid, remove dead copper, pour order 40): 0,0 0,-1820 500,-1820 2440.94,-1820 2440.94,-1440 2440.94,0 1625,0
VCC on Bottom Layer "Keep-Out Layer-No Net" (solid, remove dead copper, pour order 32): 2235,-825 2325,-825 2325,-1125 2325,-1180 2135,-1180 2130,-1180 2130,-825
VCC on Bottom Layer "Keep-Out Layer-No Net" (solid, remove dead copper, pour order 25): 1250,0 1250,-380 965,-665 925,-705 390,-705 390,-925 690,-925 1340,-925 1440,-825 1440,0
VCC on Bottom Layer "Keep-Out Layer-No Net" (solid, remove dead copper, pour order 26): 390,-1715 690,-1715 695,-1720 780,-1720 1130,-1720 1130,-915 1130,-910 825,-910 825,-1495 390,-1495
VCC on Bottom Layer "Keep-Out Layer-No Net" (solid, remove dead copper, pour order 27): 1440,-825 2135,-825 2135,-1120 2235,-1120 2235,-1170 1050,-1170 1050,-820
VCC on Bottom Layer "Keep-Out Layer-No Net" (solid, remove dead copper, pour order 34): 2135,-1120 2135,-1725 1740,-1725 1740,-1235 1740,-1120 1750,-1120
VCC on Bottom Layer "Keep-Out Layer-No Net" (solid, remove dead copper, pour order 35): 2235,-1170 2235,-825 2135,-825 2075,-825 2075,-1170
VBAT on Bottom Layer "Keep-Out Layer-No Net" (solid, remove dead copper, pour order 37): 720,-20 720,-220 1200,-220 1215,-220 1215,-50 1215,-20 1030,-20
VCC on Bottom Layer "Keep-Out Layer-No Net" (solid, remove dead copper, pour order 39): 80,-835 395,-835 440,-835 440,-920 70,-920 35,-920 35,-835
GND on Bottom Layer "Keep-Out Layer-No Net" (solid, pour order 47): -100.94,-2335 409.06,-2335 409.06,-2550 -100,-2550
GND on Bottom Layer "Keep-Out Layer-No Net" (solid, remove dead copper, pour order 48): 409.06,-2335 205,-2335 205,-2690 205,-2900 170,-2900 -100.94,-2900 -100.94,-4105 20,-4105 1150,-4105 1150,-3850 1555,-3850 1555,-3960 1600,-3960 1835,-3960 1835,-3725 1835,-3710 1925,-3710 2000,-3710 2000,-3885 2000,-4105 2190,-4105 2264.06,-4105 2264.06,-3950 2264.06,-2335 1700,-2335 1579.06,-2335 1579.06,-2710 1579.06,-2745 910,-2745 409.06,-2745 409.06,-2465
EGND on Top Layer "Keep-Out Layer-No Net" (solid, remove dead copper, pour order 41): 2440.94,-1820 0,-1820 0,-1030 0,0 1150,0 2440.94,0 2440.94,-790
OUT1 on Top Layer "Keep-Out Layer-No Net" (solid, remove dead copper, pour order 28): 385,-310 690,-310 690,-530 690,-590 870,-590 870,-760 770,-760 770,-670 385,-670
OUT2 on Top Layer "Keep-Out Layer-No Net" (solid, remove dead copper, pour order 29): 385,-1100 690,-1100 690,-1320 690,-1405 870,-1405 870,-1545 870,-1550 780,-1550 770,-1550 770,-1495 770,-1465 395,-1465
OUT2 on Top Layer "Keep-Out Layer-No Net" (solid, pour order 30): 690,-1375 870,-1375 870,-1415 870,-1408.33 650,-1408.33 650,-1375
OUT2 on Top Layer "Keep-Out Layer-No Net" (solid, remove dead copper, pour order 31): 70,-1215 415,-1215 405,-1215 405,-1465 70,-1465
OUT1 on Top Layer "Keep-Out Layer-No Net" (solid, remove dead copper, pour order 33): 70,-455 475,-455 475,-470 475,-670 70,-670
VBAT on Top Layer "Keep-Out Layer-No Net" (solid, remove dead copper, pour order 36): 960,-20 1215,-20 1215,-175 1215,-220 930,-220 720,-220 720,-20
VCC on Top Layer "Keep-Out Layer-No Net" (solid, remove dead copper, pour order 38): 60,-1600 115,-1600 115,-1655 115,-1690 385,-1690 465,-1690 465,-1715 40,-1715 35,-1715 35,-1600
IN3 on Top Layer "Keep-Out Layer-No Net" (solid, remove dead copper, pour order 42): -5,-2560 145,-2560 190,-2605 195,-2610 195,-2630 195,-2670 185,-2680 165,-2680 -5,-2680
IN4 on Top Layer "Keep-Out Layer-No Net" (solid, remove dead copper, pour order 43): -5,-2760 55,-2700 190,-2700 200,-2710 200,-2770 190,-2780 90,-2880 -5,-2880
GND on Top Layer "Keep-Out Layer-No Net" (solid, pour order 44): 415,-3185 910,-3185 910,-3685 410,-3685
GND on Top Layer "Keep-Out Layer-No Net" (solid, remove dead copper, pour order 45): -100.94,-2335 410,-2335 410,-2550 -100.94,-2550
GND on Top Layer "Keep-Out Layer-No Net" (solid, remove dead copper, pour order 46): 409.06,-2335 205,-2335 205,-2825 205,-2900 -100.94,-2900 -100.94,-4105 1150,-4105 1150,-3850 1510,-3850 1555,-3850 1555,-3960 1830,-3960 1835,-3960 1835,-3710 1980,-3710 2000,-3710 2000,-3990 2000,-4105 2025,-4105 2264.06,-4105 2264.06,-2975 2265,-2975 1675,-2975 1675,-2895 1675,-2650 1975,-2650 1975,-2975 1970,-2975 2264.06,-2975 2264.06,-2335 1579.06,-2335 1579.06,-2745 409.06,-2745

## Keep-outs
Keep-Out Layer:
  lines w10: -100.94,-4105 2264.06,-4105 2264.06,-2335 1579.06,-2335 1579.06,-2745 409.06,-2745 409.06,-2335 -100.94,-2335 -100.94,-4105 ; 0,-1820 0,0 2440.94,0 2440.94,-1820 0,-1820

## Other copper
Top Layer:
  text "武汉理工大学" at 1900,-1450 h50
  text "张艳松" at 1905,-1495 h50
  text "袁佳威" at 2065,-1495 h50
  text "李锐戈" at 1900,-1540 h50
  text "2016" at 2065,-1540 h50
  text "袁佳威" at 2145,-3595 h50 r90
  text "2016" at 2190,-3595 h50 r90
  text "张艳松" at 2145,-3755 h50 r90
  text "武汉理工大学" at 2100,-3760 h50 r90
  text "李锐戈" at 2190,-3760 h50 r90

## Silkscreen, mask and mechanical layers (free items; w line width, h text height)
Top Overlay:
  text "10K" at 1625,-180 h50 r90
  text "10uF" at 1130,-340 h50
  text "20R" at 940,-370 h50
  text ">" at 150,-400 h50 r270
  text "10K" at 1450,-440 h50 r90
  text "D" at 140,-560 h50 r270
  text ">" at 130.35,-573.72 h78.74 r270
  text ">" at 1405,-575 h50 r270
  text "D" at 1405,-615 h50 r270
  text ">" at 1405,-670 h50 r270
  text ">" at 145,-795 h50 r270
  text ">" at 1520,-855 h50 r270
  text "20R" at 940,-900 h50
  text "1.5uF" at 1115,-900 h50
  text "10uF" at 1380,-900 h50
  text "180R" at 2185,-970 h50 r90
  text "D" at 1530,-1025 h50
  text "D" at 140.35,-1103.72 h50 r270
  text "10uF" at 1135,-1115 h50
  text ">" at 130.7,-1117.45 h78.74 r270
  text "10uF" at 2385,-1140 h50 r90
  text "20R" at 945,-1160 h50
  text ">" at 1520,-1160 h50 r270
  text "470pF" at 1585,-1160 h50
  text "0.22R" at 2160,-1240 h50 r90
  text "10K" at 1730,-1290 h50
  text "1.2K" at 1915,-1290 h50
  text ">" at 1405,-1385 h50 r270
  text "10K" at 1575,-1435 h50 r90
  text "D" at 1410,-1455 h50
  text ">" at 1405,-1475 h50 r270
  text ">" at 140,-1490 h50 r270
  text "20R" at 945,-1545 h50
  text "1.5uF" at 1110,-1685 h50
  text "LED_R" at 1885,-1780 h50
  text "104" at 215,-2480 h50
  text "104" at 2075,-2745 h50 r270
  text "LED_W" at 1165,-2850 h50
  text "10uF" at 2105,-2915 h50
  text "1nF" at 365,-2920 h50 r90
  text "4K" at 160,-3065 h50 r90
  text "10K" at 1720,-3100 h50 r90
  text "10K" at 1955,-3100 h50 r90
  text "6K" at 160,-3160 h50 r90
  text "LED_B" at 100,-3755 h50 r90
  text "0R" at 1590,-3875 h50 r90
Bottom Overlay:
  text "10K" at 2175,-2820 h50
  text "C" at 710,-2955 h50
  text "C" at 595,-2960 h50
  text "D" at 1580,-2995 h50
  text "D" at 390,-3020 h50
  text "C" at 1350,-3020 h50
  text "F" at 1460,-3020 h50
  text "C" at 1220,-3025 h50
  text ">" at 395,-3050 h50 r90
  text ">" at 1660,-3120 h50 r90
  text "C" at 1680,-3365 h50 r180
  text "104" at 155,-3495 h50 r90
  text "10K" at 855,-3495 h50
  text "10uH" at 155,-3590 h50 r90
  text "10uH" at 435,-3655 h50
  text "103" at 525,-3655 h50
  text "104" at 610,-3655 h50
  text "103" at 155,-3705 h50 r90
  text "C" at 1625,-3820 h50 r180
  text "F" at 2030,-3820 h50
  text "10K" at 215,-3890 h50 r90
  text "104" at 1090,-3950 h50 r90
  text "104" at 215,-4005 h50 r90
Mechanical 15:
  lines w10: 35,-1771.65 2400,-1771.65 2400,0 1715.59,0 1715.59,-412.2 545,-412.2 545,0 80,0 35,0 35,-1771.65
  text "电容封装太小" at 2770,-1440 h100
  text "安装孔径不对" at 2805,-1585 h100
  text "电源电机焊盘太小" at 2720,-1730 h100
  text "斩波电容电感太小" at 2795,-1905 h100
  text "可以使用大肖特基" at 2755,-2045 h100

## Text inside footprints (layer, text, board x,y; h text height)
C2: Top Overlay "+" at 1797.49,-1410.05 h47.24 r180
L1: Top Overlay "+" at 2054.79,-449.07 h78.74 r180
P8: Top Overlay "1" at 2080,-2990 h50 r270; Top Overlay "2" at 2180,-2970 h50 r270; Top Overlay "5" at 2080,-3330 h50 r270; Top Overlay "6" at 2180,-3330 h50 r270